# EAGLE board Dash LEDs r2 (EAGLE 7.5.0)
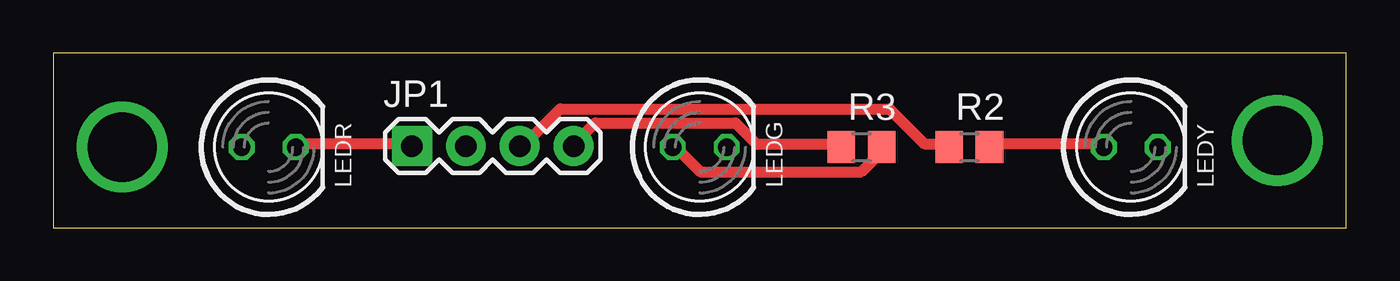
[diagram p0: board, top side]
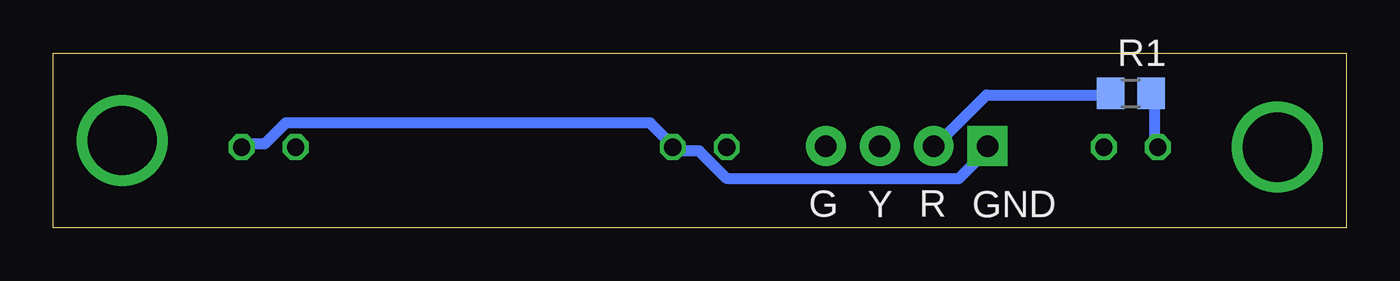
[diagram p1: board, bottom side, seen from below]

Size 60.96 x 8.26 mm. Coordinates in mm from the lower left corner, seen from the top.
Outline: 0,0 60.96,0 60.96,8.26 0,8.26 0,0
Copper layers (1*16): Top 0.0356mm / dielectric 1.5011mm / Bottom 0.0356mm
Design rules "OshPark DRC *": minimum track width 20mil, minimum drill 13mil, track to track 6mil, track to pad 6mil, pad to pad 6mil, via to via 6mil, smd to smd 6mil, copper to edge 15mil, drill to drill 6mil, minimum pad ring 7mil, minimum via ring 7mil, stop-mask expansion 3mil, vias tented up to drill 0mil, thermal gap 10mil

## Footprints (pad centres in the part's own frame; a part is rotated, then mirrored left to right if it is on the bottom)
1X04 = drill 1.016 pad 1.88 square: 1 0,0 | drill 1.016 pad 1.88: 2 2.54,0; 3 5.08,0; 4 7.62,0
LED5MM = drill 0.813 octagon: A -1.27,0; K 1.27,0
R0805 = smd 1.3 x 1.5: 1 -0.95,0; 2 0.95,0

## Placement (x,y rotation side)
JP1  [1X04]  16.92,3.86 0 top
LEDG  [LED5MM]  30.48,3.81 0 top
LEDR  [LED5MM]  10.16,3.81 0 top
LEDY  [LED5MM]  50.8,3.81 0 top
R1  499R  [R0805]  10.16,6.35 0 bottom
R2  499R  [R0805]  43.18,3.81 0 top
R3  499R  [R0805]  38.1,3.81 0 top

## Library data of the parts
JP1 = SparkFun-Connectors
LEDG LEDR LEDY = led
R1-R3 = resistor

## Nets
DRV1: JP1.2 R1.1
DRV2: JP1.3 R2.1
DRV3: JP1.4 R3.1
GND: JP1.1 LEDG.K LEDR.K LEDY.K
N$1: LEDR.A R1.2
N$2: LEDY.A R2.2
N$3: LEDG.A R3.2

## Tracks (layer width: path | path; a pad name or v marks a point on that pad's centre or on a via)
DRV1
  Bottom 0.508: R1.1 11.35,6.27 16.97,6.27 19.28,3.96 JP1.2
DRV2
  Top 0.508: R2.1 42.06,3.96 41.07,3.96 39.42,5.61 23.9,5.61 22.25,3.96 JP1.3
DRV3
  Top 0.508: R3.1 37.11,3.96 33.15,3.96 32.16,4.95 25.55,4.95 24.56,3.96 JP1.4
GND
  Top 0.508: LEDR.K 11.68,3.96 16.64,3.96 JP1.1
  Bottom 0.508: JP1.1 16.97,3.63 18.29,2.31 29.19,2.31 30.51,3.63 31.5,3.63 LEDG.K 31.83,3.96 32.82,4.95 49.99,4.95 50.98,3.96 51.97,3.96 LEDY.K
N$1
  Bottom 0.508: R1.2 9.04,6.27 9.04,3.96 LEDR.A
N$2
  Top 0.508: R2.2 44.37,3.96 49.33,3.96 LEDY.A
N$3
  Top 0.508: R3.2 38.76,3.63 38.76,3.3 38.1,2.64 30.51,2.64 29.52,3.63 LEDG.A
N$4  (via drill 3.26)
  other vias: 3.26,3.81
N$5  (via drill 3.26)
  other vias: 57.7,4.13

## Text on the board
bPlace: R | G | GND | Y